# Altium PCB InstrumentBreakout.PcbDoc
Units mil, origin at the board's own origin, x right, y up, seen from the top; angles counter-clockwise.
Board outline 700 x 1347.32 mil, 2 copper layers (Top Layer, Bottom Layer); 2 components, 8 nets, 4 pads, 39 vias.
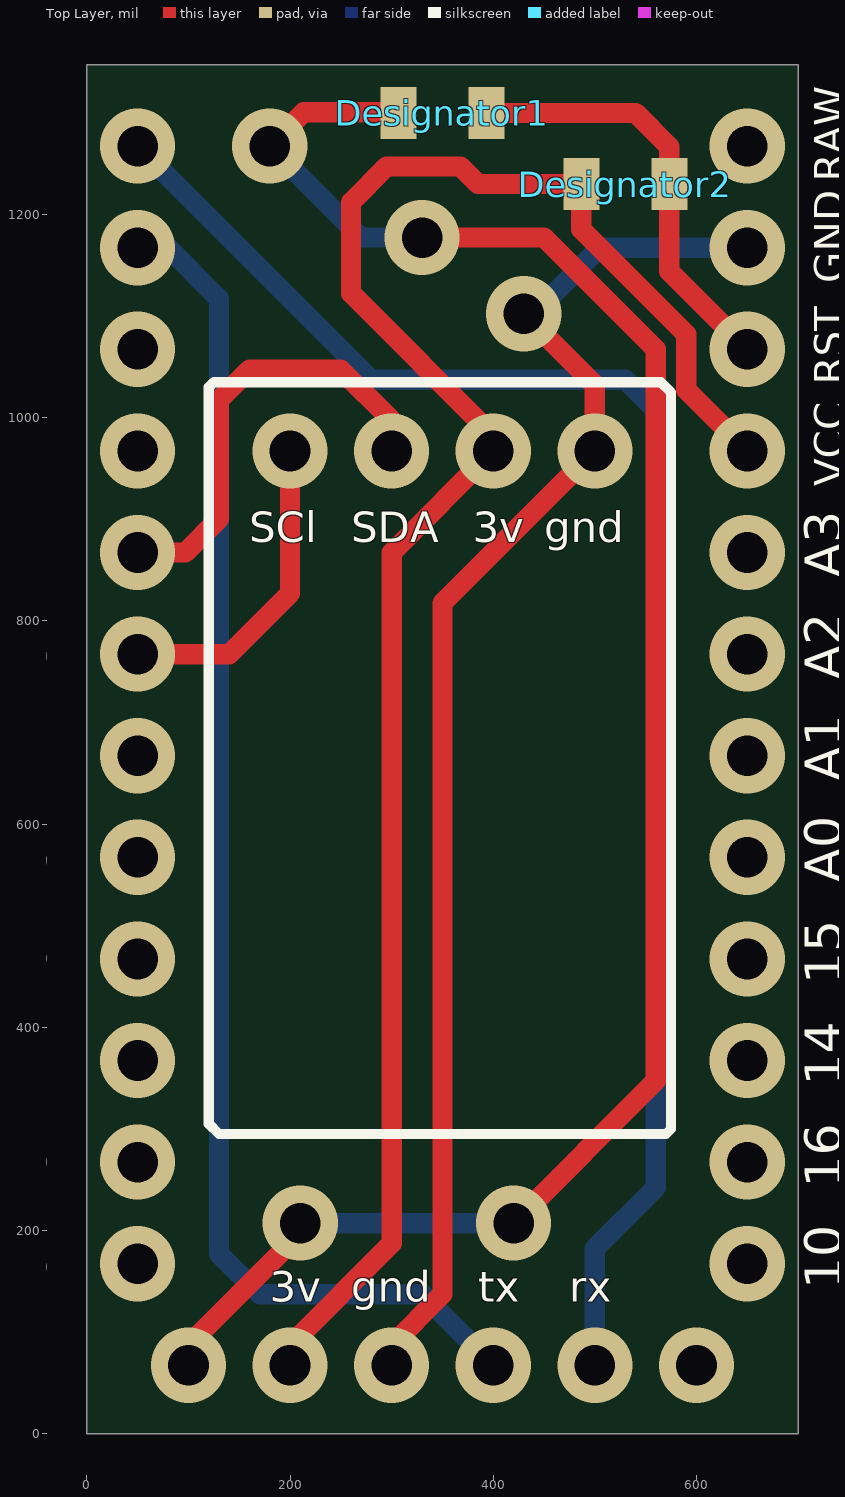
[diagram p0: Top Layer view]
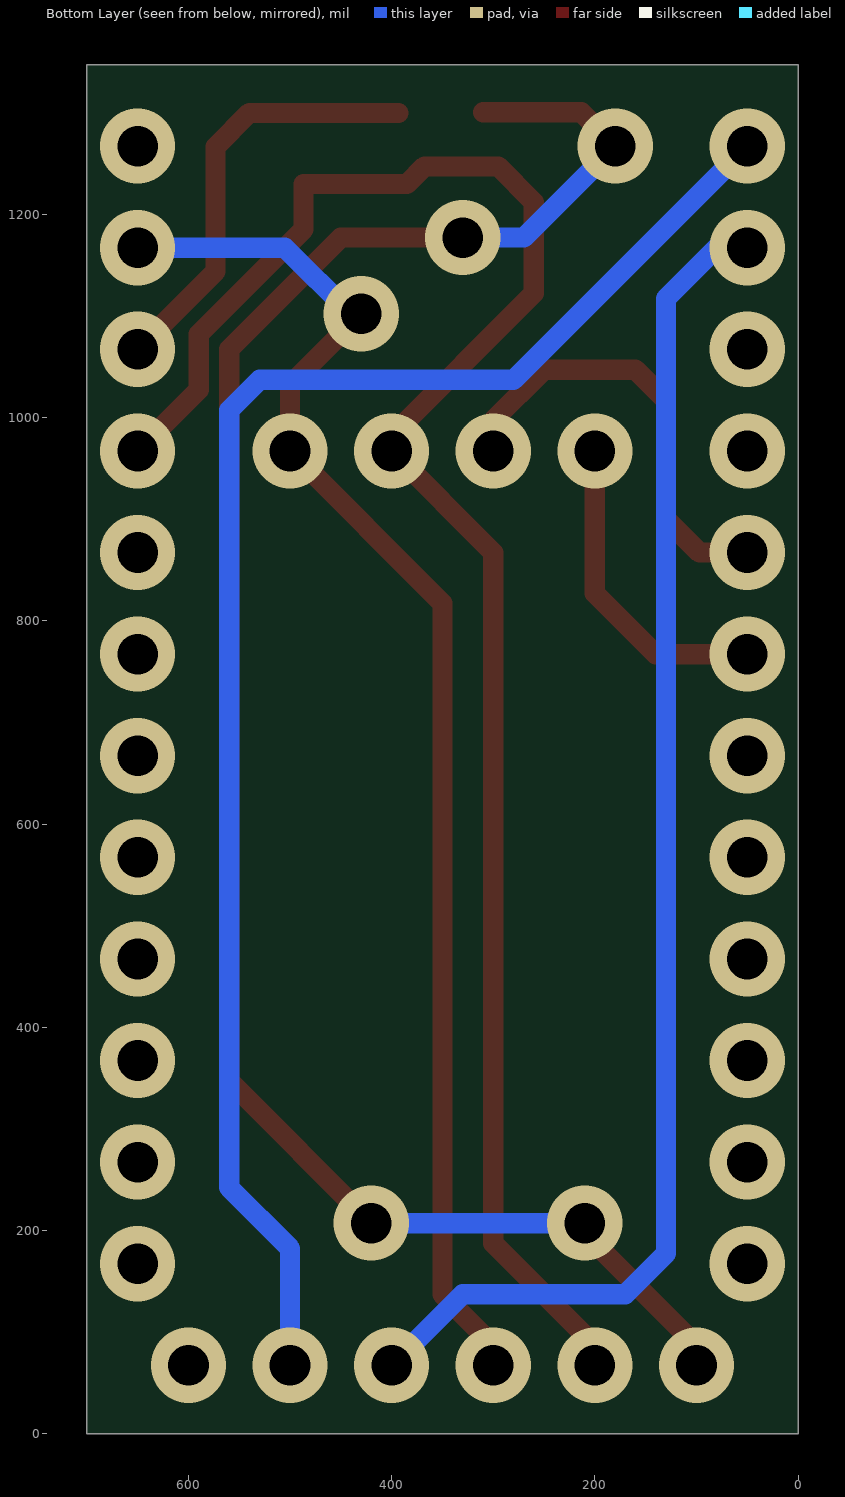
[diagram p1: Bottom Layer view, seen from below]

## Layer stack, top to bottom
Top Solder: solder mask 0.4, Solder Resist, Dk 3.5
Top Layer: signal copper 1.4
Dielectric 1: dielectric 12.6, FR-4, Dk 4.8
Bottom Layer: signal copper 1.4
Bottom Solder: solder mask 0.4, Solder Resist, Dk 3.5

## Board outline
0,0 700,0 700,1347.32 0,1347.32

## Design rules (kind name [scope] priority, off if disabled: settings)
Clearance [All] p1: gap=10
PolygonConnect [All] p1: connectstyle=Relief reliefconductorwidth=10 reliefentries=4 polygonreliefangle="90 Angle" airgapwidth=10
RoutingVias [All] p1: holewidth=28 width=50 viastyle="Through Hole" minholewidth=28 minwidth=50 maxholewidth=28 maxwidth=50
SolderMaskExpansion [All] p1: expansion=4
Width [All] p1: maxlimit=100 minlimit=10 preferedwidth=10 minimp=50.000000 maximp=50.000000 favimp=50.000000
30 further rules are at their usual default settings.

## Components (designator, comment, footprint, x,y, rotation, side; value= is the part's Value field where it differs from the comment)
Designator1 "Comment" "Res 0805 (Vishay)" 350,1300 r180 top
Designator2 "Comment" "Res 0805 (Vishay)" 530,1230 r0 top

## Footprints (in the part's own frame and the unit in brackets; to place one, negate y for a bottom-side part, rotate by r counter-clockwise, add the part's x,y. Pads: shape width x height; smd on the part's side, far side on the other; paste and mask are expansions set on the pad)
"Res 0805 (Vishay)" [mm]
  rect 0.9x1.3 smd: 1(-1.1,0) 2(1.1,0)
  body extent -1.07,-0.7 1.08,0.7, height 0.55

## Via types
v1: diameter 74, hole 40, Top Layer to Bottom Layer, 39 vias

## Nets (pads, with @x,y where several pads share a name; then routed paths per layer and width w, separated by ;. In a path a pad name is that pad's centre, name@x,y a point inside that pad or via, vN(x,y) a via of type N, cw(c..) or ccw(c..) an arc to the next point about the centre after c; other vN are vias at no path point)
3V: Designator2.1 | length 1864.5
  Top Layer w20: v1(200,67.32) 200,87.32 300,187.32 300,867.32 v1(400,967.32) 400,982.32 260,1122.32 260,1212.32 295,1247.32 367.68,1247.32 385,1230 Designator2.1 486.69,1185.63 590,1082.32 590,1027.32 v1(650,967.32)
GND:  | length 1393.8
  Top Layer w20: v1(300,67.32) 300,87.32 350,137.32 350,817.32 v1(500,967.32) 500,1032.32 v1(430,1102.32)
  Bottom Layer w20: v1(430,1102.32) 440,1102.32 505,1167.32 v1(650,1167.32)
rst: Designator1.1 Designator2.2 | length 424.9
  Top Layer w20: Designator1.1 540,1300 573.31,1266.69 Designator2.2 573.31,1144.02 v1(650,1067.32)
RX:  | length 1582.5
  Bottom Layer w20: v1(50,1267.32) 280,1037.32 530,1037.32 560,1007.32 560,242.32 500,182.32 v1(500,67.32)
SCL:  | length 314.9
  Top Layer w20: v1(50,767.32) 140,767.32 200,827.32 v1(200,967.32)
SDA:  | length 443.8
  Top Layer w20: v1(50,867.32) 97,867.32 130,900.32 130,1017.32 160,1047.32 250,1047.32 300,997.32 v1(300,967.32)
STATE: Designator1.2 | length 1920.2
  Top Layer w20: v1(100,67.32) 100,87.32 210,197.32 v1(210,207.32) ; v1(180,1267.32) 213.31,1300.63 Designator1.2@310,1300.63 ; v1(330,1177.32) 450,1177.32 560,1067.32 560,347.32 v1(420,207.32)
  Bottom Layer w20: v1(180,1267.32) 270,1177.32 v1(330,1177.32) ; v1(210,207.32) v1(420,207.32)
TX:  | length 1356.3
  Bottom Layer w20: v1(50,1167.32) 80,1167.32 130,1117.32 130,177.32 170,137.32 330,137.32 v1(400,67.32)
copper on no net:
  other v1: 600,67.32 50,167.32 650,167.32 50,267.32 650,267.32 50,367.32 650,367.32 50,467.32 650,467.32 50,567.32 650,567.32 50,667.32 650,667.32 650,767.32 650,867.32 50,967.32 50,1067.32 650,1267.32

## Silkscreen, mask and mechanical layers (free items; w line width, h text height)
Top Overlay:
  lines w10: 120,305 130,295 570,295 575,300 575,1025 565,1035 125,1035 120,1030 120,305
  text "RAW" at 755,1232.32 h49.6 r90
  text "TXO" at -33.07,1226.3 h49.6 r90
  text "GND" at 755,1132.32 h49.6 r90
  text "RXI" at -33.07,1126.3 h49.6 r90
  text "RST" at 755,1032.32 h49.6 r90
  text "GND" at -33.07,1026.3 h49.6 r90
  text "VCC" at 755,932.32 h49.6 r90
  text "GND" at -33.07,926.3 h49.6 r90
  text "SCl" at 160,877.32 h30
  text "SDA" at 260,877.32 h30
  text "3v" at 380,877.32 h30
  text "gnd" at 450,877.32 h30
  text "2" at -42.07,853.3 h49.6 r90
  text "A3" at 755,842.32 h62 r90
  text "3" at -28.07,751.3 h62 r90
  text "A2" at 755,742.32 h62 r90
  text "4" at -28.07,651.3 h62 r90
  text "A1" at 755,642.32 h62 r90
  text "5" at -28.07,551.3 h62 r90
  text "A0" at 755,542.32 h62 r90
  text "6" at -28.07,451.3 h62 r90
  text "15" at 755,442.32 h62 r90
  text "7" at -28.07,351.3 h62 r90
  text "14" at 755,342.32 h62 r90
  text "8" at -28.07,251.3 h62 r90
  text "16" at 755,242.32 h62 r90
  text "9" at -28.07,151.3 h62 r90
  text "10" at 755,142.32 h62 r90
  text "3v" at 180,130 h30
  text "gnd" at 260,130 h30
  text "tx" at 385,130 h30
  text "rx" at 475,130 h30
Mechanical 1:
  lines w10: 0,1347.32 0,0 700,0 ; 0,1347.32 0,1347.32 ; 0,1347.32 700,1347.32 ; 700,0 700,1347.32 ; 700,0 700,0 ; 700,1347.32 700,1347.32